# Altium PCB Oski_PCB.PcbDoc
Units mil, origin at the board's own origin, x right, y up, seen from the top; angles counter-clockwise.
Board outline 6000 x 4000 mil, 2 copper layers (Top Layer, Bottom Layer); 96 components, 138 nets, 653 pads, 0 vias.
Unrouted connection lines stored in the file: 361.
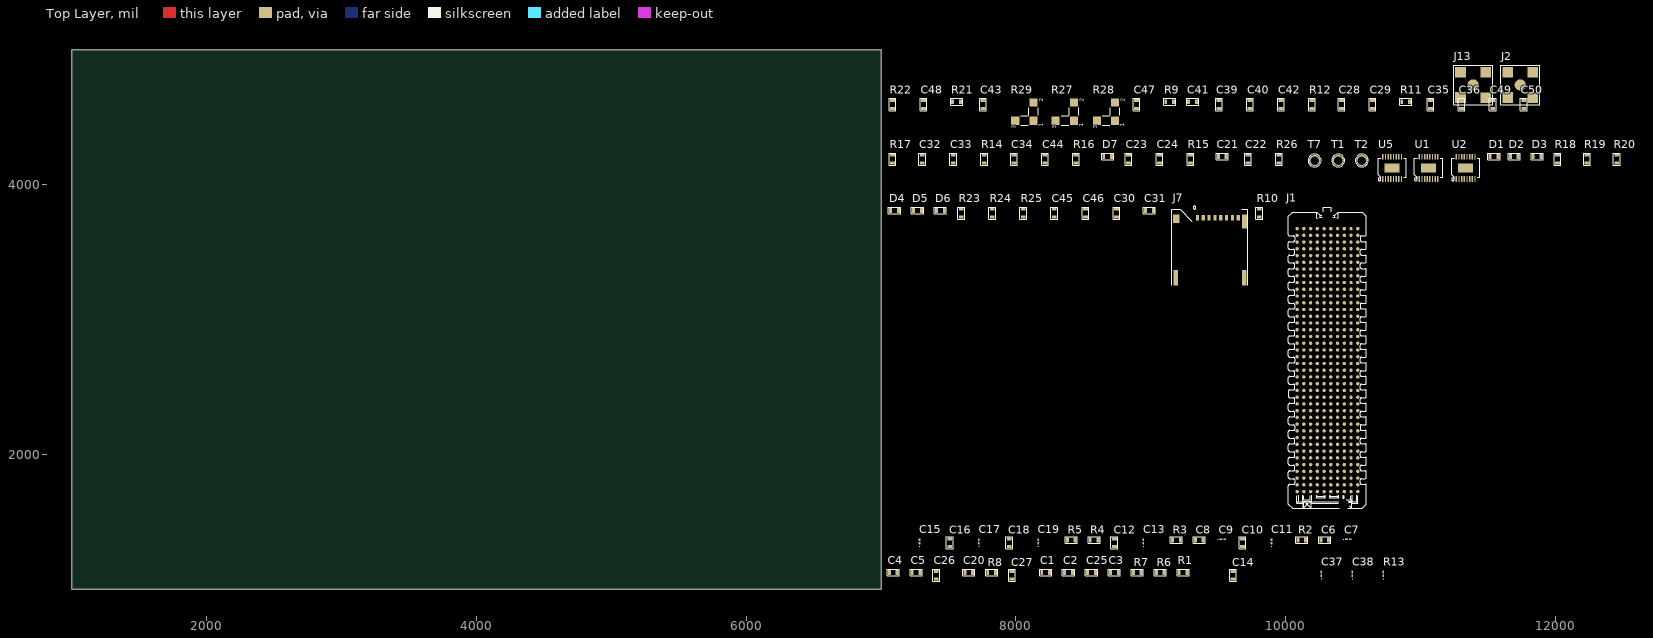
[diagram p0: Top Layer view]
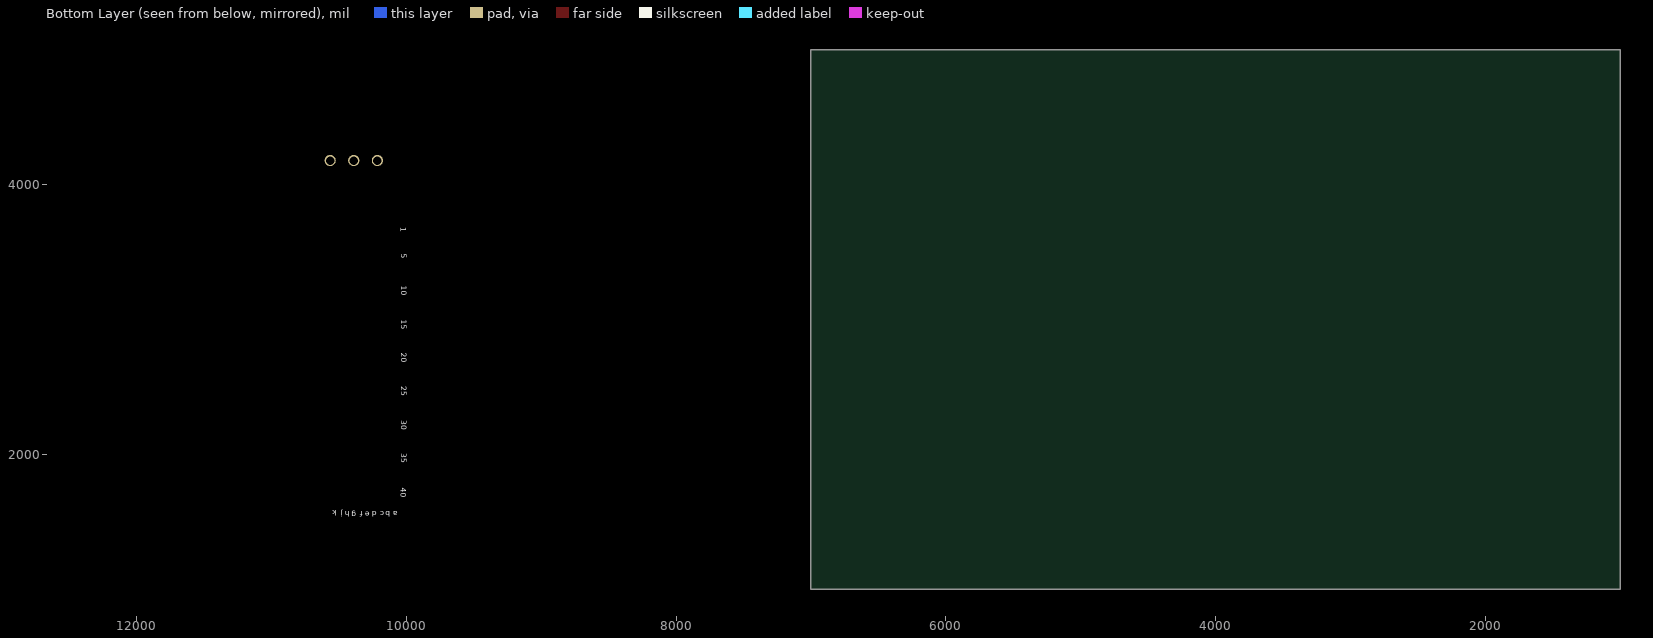
[diagram p1: Bottom Layer view, seen from below]

## Layer stack, top to bottom
Top Solder: solder mask 0.4, Solder Resist, Dk 3.5
Top Layer: signal copper 1.4
Dielectric 1: dielectric 12.6, FR-4, Dk 4.8
Bottom Layer: signal copper 1.4
Bottom Solder: solder mask 0.4, Solder Resist, Dk 3.5

## Board outline
1000,1000 7000,1000 7000,5000 1000,5000

## Design rules (kind name [scope] priority, off if disabled: settings)
Clearance [All] p1: gap=10 ignorepadtopadclearanceinfootprint=FALSE except(0: Arc-Hole Track-Hole SMDPad-Hole THPad-Hole Via-Hole Fill-Hole Poly-Hole Region-Hole Text-Hole)
PolygonConnect [All] p1: connectstyle=Relief reliefconductorwidth=10 reliefentries=4 polygonreliefangle="90 Angle" airgapwidth=10
RoomDefinition clocking [InComponentClass('clocking')] p1: confinementstyle=ConfineIn formatcopy=TRUE lockcomponents=FALSE outline 4185,3520 6185,3520 6185,4520 4185,4520
RoomDefinition RF_top [InComponentClass('RF_top')] p2: confinementstyle=ConfineIn formatcopy=TRUE lockcomponents=FALSE outline 1705,2090 3705,2090 3705,3090 1705,3090
RoomDefinition power [InComponentClass('power')] p3: confinementstyle=ConfineIn formatcopy=TRUE lockcomponents=FALSE outline 4200,2075 6200,2075 6200,3075 4200,3075
RoomDefinition Digital_top [InComponentClass('Digital_top')] p4: confinementstyle=ConfineIn formatcopy=TRUE lockcomponents=FALSE outline 1765,3510 3765,3510 3765,4510 1765,4510
RoutingVias [All] p1: holewidth=28 width=50 viastyle="Through Hole" minholewidth=28 minwidth=50 maxholewidth=28 maxwidth=50
SolderMaskExpansion [All] p1: expansion=4 istentingtop=FALSE
Width [All] p1: maxlimit=10 minlimit=10 preferedwidth=10
30 further rules are at their usual default settings.

## Classes and differential pairs
component class clocking: H7 J2 J6 J13 S1
component class RF_top: C28 C29 C35 C36 C39 C40 C41 C42 C43 C47 C48 C49 C50 R9 R11 R12 R21 R22 R27 R28 R29 RF_IO?
component class power: C1 C2 C3 C4 C5 C6 C8 C9 C10 C11 C12 C16 C19 C20 C21 C22 C23 C24 C25 C26 C32 C33 C34 C44 D1 D2 D3 D7 Power_IO R1 R2 R3 R4 R14 R15 R16 R17 R18 R19 R20 R26 R? T1 T2 T7 U1 U2 U5 U?
component class Digital_top: C1 C2 C3 C4 C20 C25 C26 C27 C30 C31 C37 C38 C45 C46 D4 D5 D6 Digital_IO J1 J7 R1 R6 R7 R8 R10 R13 R23 R24 R25 U?

## Components (designator, comment, footprint, x,y, rotation, side; value= is the part's Value field where it differs from the comment)
C1 "0.1uF" 0603#1 8220,1125 r0 top
C2 "0.1uF" 0603#1 8390,1125 r0 top
C3 "0.1uF" 0603#1 8730,1125 r0 top
C4 "0.1uF" 0603#1 7090,1125 r0 top
C5 "0.1uF" 0603#1 7260,1125 r0 top
C6 "0.1uF" 0603#1 10290,1365 r0 top
C7 "10uF" 0603#2 10465,1370 r0 top
C8 "0.1uF" 0603#1 9360,1365 r0 top
C9 "10uF" 0603#2 9535,1370 r0 top
C10 "0.1uF" 0603#1 9680,1345 r90 top
C11 "10uF" 0603#2 9895,1355 r90 top
C12 "0.1uF" 0603#1 8730,1345 r90 top
C13 "10uF" 0603#2 8945,1355 r90 top
C14 "0.1uF" 0603#1 9610,1105 r90 top
C15 "10uF" 0603#2 7285,1355 r90 top
C16 "0.1uF" 0603#1 7510,1345 r90 top
C17 "10uF" 0603#2 7725,1355 r90 top
C18 "0.1uF" 0603#1 7950,1345 r90 top
C19 "10uF" 0603#2 8165,1355 r90 top
C20 "0.1uF" 0603#1 7650,1125 r0 top
C21 "0.1uF" 0603#1 9530,4210 r0 top
C22 "10uF" 0603#1 9720,4190 r90 top
C23 "0.1uF" 0603#1 8835,4190 r90 top
C24 "10uF" 0603#1 9065,4190 r90 top
C25 "0.1uF" 0603#1 8560,1125 r0 top
C26 "0.1uF" 0603#1 7410,1105 r90 top
C27 "0.1uF" 0603#1 7970,1105 r90 top
C28 "10u" 0603#1 10415,4595 r90 top
C29 "0.1u" 0603#1 10645,4595 r90 top
C30 "0.1uF" 0603#1 8745,3790 r90 top
C31 "0.1uF" 0603#1 8990,3810 r0 top
C32 "0.1uF" 0603#1 7305,4190 r90 top
C33 "10uF" 0603#1 7535,4190 r90 top
C34 "0.1uF" 0603#1 7985,4190 r90 top
C35 "0.1u" 0603#1 11075,4595 r90 top
C36 "10u" 0603#1 11305,4595 r90 top
C37 "10uF" 0603#2 10265,1115 r90 top
C38 "10uF" 0603#2 10495,1115 r90 top
C39 "0.1u" 0603#1 9505,4595 r90 top
C40 "22p" 0603#1 9735,4595 r90 top
C41 "1n" 0603#1 9310,4615 r0 top
C42 "5.1p" 0603#1 9965,4595 r90 top
C43 "2.9p" 0603#1 7755,4595 r90 top
C44 "10uF" 0603#1 8215,4190 r90 top
C45 "0.1uF" 0603#1 8285,3790 r90 top
C46 "0.1uF" 0603#1 8515,3790 r90 top
C47 "5.1p" 0603#1 8895,4595 r90 top
C48 "2.9p" 0603#1 7315,4595 r90 top
C49 "0.1uF" 0603#1 11535,4595 r90 top
C50 "0.1uF" 0603#1 11765,4595 r90 top
D1 "DISCRETE_LED" 0603#1 11545,4210 r0 top
D2 "DISCRETE_LED" 0603#1 11695,4210 r0 top
D3 "DISCRETE_LED" 0603#1 11865,4210 r0 top
D4 "DISCRETE_LED" 0603#1 7100,3810 r0 top
D5 "DISCRETE_LED" 0603#1 7270,3810 r0 top
D6 "DISCRETE_LED" 0603#1 7440,3810 r0 top
D7 "DISCRETE_LED" 0603#1 8680,4210 r0 top
J1 "Con 400 pins in 10 parts: abcdefghjk VITA 57" CON-400-1.27-60.0X14.7/PLUG-SEARAY 10310,2700 r90 top
J2 "0732511352" CON-001-250X250/SMA-SMT 11740,4740 r0 top
J7 "uSD card conn 5033981892" CON-008-1.1-13.1X14.0/MICROSD_MOLEX 9440,3535 r0 top
J13 "0732511352" CON-001-250X250/SMA-SMT 11390,4740 r0 top
R1 "16k" 0603#1 9240,1125 r0 top
R2 "1300" 0603#1 10120,1365 r0 top
R3 "698" 0603#1 9190,1365 r0 top
R4 "200" 0603#1 8580,1365 r0 top
R5 "200" 0603#1 8410,1365 r0 top
R6 "16k" 0603#1 9070,1125 r0 top
R7 "16k" 0603#1 8900,1125 r0 top
R8 "16k" 0603#1 7820,1125 r0 top
R9 "33.2" 0603#1 9140,4615 r0 top
R10 "10k" 0603#1 9805,3790 r90 top
R11 "2.8k" 0603#1 10890,4615 r0 top
R12 "200" 0603#1 10195,4595 r90 top
R13 "0" 0603#2 10725,1115 r90 top
R14 "6.7k" 0603#1 7765,4190 r90 top
R15 "1500" 0603#1 9295,4190 r90 top
R16 "187" 0603#1 8445,4190 r90 top
R17 "10k" 0603#1 7085,4190 r90 top
R18 "470" 0603#1 12015,4190 r90 top
R19 "470" 0603#1 12235,4190 r90 top
R20 "470" 0603#1 12455,4190 r90 top
R21 "0" 0603#1 7560,4615 r0 top
R22 "0" 0603#1 7085,4595 r90 top
R23 "470" 0603#1 7595,3790 r90 top
R24 "470" 0603#1 7825,3790 r90 top
R25 "470" 0603#1 8055,3790 r90 top
R26 "470" 0603#1 9950,4190 r90 top
R27 "Resistors dual no stub" 1206-DUAL-NOSTUB 8430,4475 r0 top
R28 "Resistors dual no stub" 1206-DUAL-NOSTUB 8735,4475 r0 top
R29 "Resistors dual no stub" 1206-DUAL-NOSTUB 8130,4475 r0 top
T1 "575-4" TP-63/ROUND-THT 10390,4180 r0 top
T2 "575-4" TP-63/ROUND-THT 10565,4180 r0 top
T7 "575-4" TP-63/ROUND-THT 10215,4180 r0 top
U1 "LT3022" GW-16-.5-4.9X4.0/THM 11060,4125 r0 top
U2 "LT3022" GW-16-.5-4.9X4.0/THM 11335,4125 r0 top
U5 "LT3022" GW-16-.5-4.9X4.0/THM 10790,4125 r0 top

## Footprints (in the part's own frame and the unit in brackets; to place one, negate y for a bottom-side part, rotate by r counter-clockwise, add the part's x,y. Pads: shape width x height; smd on the part's side, far side on the other; paste and mask are expansions set on the pad)
0603#1 [mm]
  rect 0.55x0.9 smd mask+0: 1(-0.73,0) 2(0.73,0)
  silkscreen extent -1.14,-0.64 1.14,0.64, body extent -0.76,-0.38 0.76,0.38, height 0.89
0603#2 [mm] "Chip Inductor, Body 0.6x0.3mm, IPC High Density"
  rect 0.5x0.3 smd: 1(-0.35,0) 2(0.35,0)
  silkscreen extent -0.9,-0.05 -0.9,0.05, body extent -0.33,-0.18 0.33,0.18, height 0.55
1206-DUAL-NOSTUB [mil]
  rect 60x60 smd: 1(0,-0.02) 2(0,134.98) 3(-135,-0.02)
  silkscreen extent -95,-35 35,95
CON-001-250X250/SMA-SMT [mm]
  round 2.127 smd: 1(0,0)
  rect 2x2 smd: 2(-2.375,2.375) 3(2.375,2.375) 4(2.375,-2.375) 5(-2.375,-2.35)
  silkscreen extent -3.68,-3.68 3.68,3.68, body extent -3.17,-3.17 3.18,3.17, height 9.65
CON-008-1.1-13.1X14.0/MICROSD_MOLEX [mm]
  rect 0.6x1.05 smd: 1(-2.4,5.615) 2(-1.3,5.615) 3(-0.2,5.615) 4(0.9,5.615) 5(2,5.615) 6(3.1,5.615) 7(4.2,5.615) 8(5.3,5.615)
  rect 0.82x2.93 smd: 9(-6.46,-5.68) 10(6.42,-5.68)
  rect 1.16x1.63 smd: 11(-6.39,5.415)
  rect 0.98x2.6 smd: 12(6.48,4.915)
  silkscreen extent -7.24,-7.11 7.11,7.75, body extent -6.55,-7.03 6.55,7.02, height 0.83
CON-400-1.27-60.0X14.7/PLUG-SEARAY [mm] "Connector VITA 57, 400 Male contacts in 10 rows abcdefghij"
  round 0 hole 1.3 unplated: 1(-27.191,-3.048) 2(27.191,0)
  round 0.64 smd paste-0.32: a1(24.765,5.715) a2(23.495,5.715) a3(22.225,5.715) a4(20.955,5.715) a5(19.685,5.715) a6(18.415,5.715) a7(17.145,5.715) a8(15.875,5.715) a9(14.605,5.715) a10(13.335,5.715) a11(12.065,5.715) a12(10.795,5.715) a13(9.525,5.715) a14(8.255,5.715) a15(6.985,5.715) a16(5.715,5.715) a17(4.445,5.715) a18(3.175,5.715) a19(1.905,5.715) a20(0.635,5.715) a21(-0.635,5.715) a22(-1.905,5.715) a23(-3.175,5.715) a24(-4.445,5.715) a25(-5.715,5.715) a26(-6.985,5.715) a27(-8.255,5.715) a28(-9.525,5.715) a29(-10.795,5.715) a30(-12.065,5.715) a31(-13.335,5.715) a32(-14.605,5.715) a33(-15.875,5.715) a34(-17.145,5.715) a35(-18.415,5.715) a36(-19.685,5.715) a37(-20.955,5.715) a38(-22.225,5.715) a39(-23.495,5.715) a40(-24.765,5.715) b1(24.765,4.445) b2(23.495,4.445) b3(22.225,4.445) b4(20.955,4.445) b5(19.685,4.445) b6(18.415,4.445) b7(17.145,4.445) b8(15.875,4.445) b9(14.605,4.445) b10(13.335,4.445) b11(12.065,4.445) b12(10.795,4.445) b13(9.525,4.445) b14(8.255,4.445) b15(6.985,4.445) b16(5.715,4.445) b17(4.445,4.445) b18(3.175,4.445) b19(1.905,4.445) b20(0.635,4.445) b21(-0.635,4.445) b22(-1.905,4.445) b23(-3.175,4.445) b24(-4.445,4.445) b25(-5.715,4.445) b26(-6.985,4.445) b27(-8.255,4.445) b28(-9.525,4.445) b29(-10.795,4.445) b30(-12.065,4.445) b31(-13.335,4.445) b32(-14.605,4.445) b33(-15.875,4.445) b34(-17.145,4.445) b35(-18.415,4.445) b36(-19.685,4.445) b37(-20.955,4.445) b38(-22.225,4.445) b39(-23.495,4.445) b40(-24.765,4.445) c1(24.765,3.175) c2(23.495,3.175) c3(22.225,3.175) c4(20.955,3.175) c5(19.685,3.175) c6(18.415,3.175) c7(17.145,3.175) c8(15.875,3.175) c9(14.605,3.175) c10(13.335,3.175) c11(12.065,3.175) c12(10.795,3.175) c13(9.525,3.175) c14(8.255,3.175) c15(6.985,3.175) c16(5.715,3.175) c17(4.445,3.175) c18(3.175,3.175) c19(1.905,3.175) c20(0.635,3.175) c21(-0.635,3.175) c22(-1.905,3.175) c23(-3.175,3.175) c24(-4.445,3.175) c25(-5.715,3.175) c26(-6.985,3.175) c27(-8.255,3.175) c28(-9.525,3.175) c29(-10.795,3.175) c30(-12.065,3.175) c31(-13.335,3.175) c32(-14.605,3.175) c33(-15.875,3.175) c34(-17.145,3.175) c35(-18.415,3.175) c36(-19.685,3.175) c37(-20.955,3.175) c38(-22.225,3.175) c39(-23.495,3.175) c40(-24.765,3.175) d1(24.765,1.905) d2(23.495,1.905) d3(22.225,1.905) d4(20.955,1.905) d5(19.685,1.905) d6(18.415,1.905) d7(17.145,1.905) d8(15.875,1.905) d9(14.605,1.905) d10(13.335,1.905) d11(12.065,1.905) d12(10.795,1.905) d13(9.525,1.905) d14(8.255,1.905) d15(6.985,1.905) d16(5.715,1.905) d17(4.445,1.905) d18(3.175,1.905) d19(1.905,1.905) d20(0.635,1.905) d21(-0.635,1.905) d22(-1.905,1.905) d23(-3.175,1.905) d24(-4.445,1.905) d25(-5.715,1.905) d26(-6.985,1.905) d27(-8.255,1.905) d28(-9.525,1.905) d29(-10.795,1.905) d30(-12.065,1.905) d31(-13.335,1.905) d32(-14.605,1.905) d33(-15.875,1.905) d34(-17.145,1.905) d35(-18.415,1.905) d36(-19.685,1.905) d37(-20.955,1.905) d38(-22.225,1.905) d39(-23.495,1.905) d40(-24.765,1.905) e1(24.765,0.635) e2(23.495,0.635) e3(22.225,0.635) e4(20.955,0.635) e5(19.685,0.635) e6(18.415,0.635) e7(17.145,0.635) e8(15.875,0.635) e9(14.605,0.635) e10(13.335,0.635) e11(12.065,0.635) e12(10.795,0.635) e13(9.525,0.635) e14(8.255,0.635) e15(6.985,0.635) e16(5.715,0.635) e17(4.445,0.635) e18(3.175,0.635) e19(1.905,0.635) e20(0.635,0.635) e21(-0.635,0.635) e22(-1.905,0.635) e23(-3.175,0.635) e24(-4.445,0.635) e25(-5.715,0.635) e26(-6.985,0.635) e27(-8.255,0.635) e28(-9.525,0.635) e29(-10.795,0.635) e30(-12.065,0.635) e31(-13.335,0.635) e32(-14.605,0.635) e33(-15.875,0.635) e34(-17.145,0.635) e35(-18.415,0.635) e36(-19.685,0.635) e37(-20.955,0.635) e38(-22.225,0.635) e39(-23.495,0.635) e40(-24.765,0.635) f1(24.765,-0.635) f2(23.495,-0.635) f3(22.225,-0.635) f4(20.955,-0.635) f5(19.685,-0.635) f6(18.415,-0.635) f7(17.145,-0.635) f8(15.875,-0.635) f9(14.605,-0.635) f10(13.335,-0.635) f11(12.065,-0.635) f12(10.795,-0.635) f13(9.525,-0.635) f14(8.255,-0.635) f15(6.985,-0.635) f16(5.715,-0.635) f17(4.445,-0.635) f18(3.175,-0.635) f19(1.905,-0.635) f20(0.635,-0.635) f21(-0.635,-0.635) f22(-1.905,-0.635) f23(-3.175,-0.635) f24(-4.445,-0.635) f25(-5.715,-0.635) f26(-6.985,-0.635) f27(-8.255,-0.635) f28(-9.525,-0.635) f29(-10.795,-0.635) f30(-12.065,-0.635) f31(-13.335,-0.635) f32(-14.605,-0.635) f33(-15.875,-0.635) f34(-17.145,-0.635) f35(-18.415,-0.635) f36(-19.685,-0.635) f37(-20.955,-0.635) f38(-22.225,-0.635) f39(-23.495,-0.635) f40(-24.765,-0.635) g1(24.765,-1.905) g2(23.495,-1.905) g3(22.225,-1.905) g4(20.955,-1.905) g5(19.685,-1.905) g6(18.415,-1.905) g7(17.145,-1.905) g8(15.875,-1.905) g9(14.605,-1.905) g10(13.335,-1.905) g11(12.065,-1.905) g12(10.795,-1.905) g13(9.525,-1.905) g14(8.255,-1.905) g15(6.985,-1.905) g16(5.715,-1.905) g17(4.445,-1.905) g18(3.175,-1.905) g19(1.905,-1.905) g20(0.635,-1.905) g21(-0.635,-1.905) g22(-1.905,-1.905) g23(-3.175,-1.905) g24(-4.445,-1.905) g25(-5.715,-1.905) g26(-6.985,-1.905) g27(-8.255,-1.905) g28(-9.525,-1.905) g29(-10.795,-1.905) g30(-12.065,-1.905) g31(-13.335,-1.905) g32(-14.605,-1.905) g33(-15.875,-1.905) g34(-17.145,-1.905) g35(-18.415,-1.905) g36(-19.685,-1.905) g37(-20.955,-1.905) g38(-22.225,-1.905) g39(-23.495,-1.905) g40(-24.765,-1.905) h1(24.765,-3.175) h2(23.495,-3.175) h3(22.225,-3.175) h4(20.955,-3.175) h5(19.685,-3.175) h6(18.415,-3.175) h7(17.145,-3.175) h8(15.875,-3.175) h9(14.605,-3.175) h10(13.335,-3.175) h11(12.065,-3.175) h12(10.795,-3.175) h13(9.525,-3.175) h14(8.255,-3.175) h15(6.985,-3.175) h16(5.715,-3.175) h17(4.445,-3.175) h18(3.175,-3.175) h19(1.905,-3.175) h20(0.635,-3.175) h21(-0.635,-3.175) h22(-1.905,-3.175) h23(-3.175,-3.175) h24(-4.445,-3.175) h25(-5.715,-3.175) h26(-6.985,-3.175) h27(-8.255,-3.175) h28(-9.525,-3.175) h29(-10.795,-3.175) h30(-12.065,-3.175) h31(-13.335,-3.175) h32(-14.605,-3.175) h33(-15.875,-3.175) h34(-17.145,-3.175) h35(-18.415,-3.175) h36(-19.685,-3.175) h37(-20.955,-3.175) h38(-22.225,-3.175) h39(-23.495,-3.175) h40(-24.765,-3.175) j1(24.765,-4.445) j2(23.495,-4.445) j3(22.225,-4.445) j4(20.955,-4.445) j5(19.685,-4.445) j6(18.415,-4.445) j7(17.145,-4.445) j8(15.875,-4.445) j9(14.605,-4.445) j10(13.335,-4.445) j11(12.065,-4.445) j12(10.795,-4.445) j13(9.525,-4.445) j14(8.255,-4.445) j15(6.985,-4.445) j16(5.715,-4.445) j17(4.445,-4.445) j18(3.175,-4.445) j19(1.905,-4.445) j20(0.635,-4.445) j21(-0.635,-4.445) j22(-1.905,-4.445) j23(-3.175,-4.445) j24(-4.445,-4.445) j25(-5.715,-4.445) j26(-6.985,-4.445) j27(-8.255,-4.445) j28(-9.525,-4.445) j29(-10.795,-4.445) j30(-12.065,-4.445) j31(-13.335,-4.445) j32(-14.605,-4.445) j33(-15.875,-4.445) j34(-17.145,-4.445) j35(-18.415,-4.445) j36(-19.685,-4.445) j37(-20.955,-4.445) j38(-22.225,-4.445) j39(-23.495,-4.445) j40(-24.765,-4.445) k1(24.765,-5.715) k2(23.495,-5.715) k3(22.225,-5.715) k4(20.955,-5.715) k5(19.685,-5.715) k6(18.415,-5.715) k7(17.145,-5.715) k8(15.875,-5.715) k9(14.605,-5.715) k10(13.335,-5.715) k11(12.065,-5.715) k12(10.795,-5.715) k13(9.525,-5.715) k14(8.255,-5.715) k15(6.985,-5.715) k16(5.715,-5.715) k17(4.445,-5.715) k18(3.175,-5.715) k19(1.905,-5.715) k20(0.635,-5.715) k21(-0.635,-5.715) k22(-1.905,-5.715) k23(-3.175,-5.715) k24(-4.445,-5.715) k25(-5.715,-5.715) k26(-6.985,-5.715) k27(-8.255,-5.715) k28(-9.525,-5.715) k29(-10.795,-5.715) k30(-12.065,-5.715) k31(-13.335,-5.715) k32(-14.605,-5.715) k33(-15.875,-5.715) k34(-17.145,-5.715) k35(-18.415,-5.715) k36(-19.685,-5.715) k37(-20.955,-5.715) k38(-22.225,-5.715) k39(-23.495,-5.715) k40(-24.765,-5.715)
  silkscreen extent -27.89,-7.34 28.78,7.34, body extent -27.89,-7.34 28.78,7.34, height 5.61
GW-16-.5-4.9X4.0/THM [mm]
  rect 0.25x1.1 smd: 1(-1.75,-2.1) 2(-1.25,-2.1) 3(-0.75,-2.1) 4(-0.25,-2.1) 5(0.25,-2.1) 6(0.75,-2.1) 7(1.25,-2.1) 8(1.75,-2.1) 9(1.75,2.1) 10(1.25,2.1) 11(0.75,2.1) 12(0.25,2.1) 13(-0.25,2.1) 14(-0.75,2.1) 15(-1.25,2.1) 16(-1.75,2.1)
  rect 2.85x1.65 smd: 17(0,0)
  silkscreen extent -2.67,-2.41 2.67,1.78, body extent -2.5,-1.5 2.5,1.5, height 0.5
TP-63/ROUND-THT [mil]
  round 83 hole 63 mask+0: 1(0,0)
  silkscreen extent -48,-48 48,48, body extent -62,-62 62,63, height 220

## Part data
C1 C2 C3 C4 C5 C6 C8 C10 C12 C14 C16 C18 C20 C21 C23 C25 C26 C27 C30 C31 C32 C34 C45 C46 C49 C50: library part DISCRETE_C, "0.1uF 0402"
C7 C9 C11 C13 C15 C17 C19 C22 C24 C33 C37 C38 C44: library part DISCRETE_C, "10uF 0603"
C28 C29 C35 C36 C39 C40 C41 C42 C43 C47 C48: library part DISCRETE_C, "Capacitor generic"
D1 D2 D3 D4 D5 D6 D7: "LED generic"
J1: library part CON_400pin_10x40_VITA57_PLUG, "Con VITA 57, 400 male contacts in 10 parts abcdefghjk", Author="CERN DEM JLC"
J2 J13: library part CON_RF_SMA, "Con RF SMA"
J7: library part CON_010pin_uSD_CARD_RECP, "Con 8 pins secure digital card slot (micro)"
R1 R6 R7 R8: library part DISCRETE_R
R2 R3 R4 R5 R15 R16 R18 R19 R20 R23 R24 R25 R26: library part DISCRETE_R, "200 0402"
R9 R11 R12 R14 R17 R21 R22: library part DISCRETE_R, "Resistor generic"
R10: library part DISCRETE_R, "16k"
R13: library part DISCRETE_R, "0 0603"
R27 R28 R29: library part DISCRETE_R_DUAL
T1 T2 T7: library part TEST_PT, "Test point"
U1 U2 U5: library part IC_LT3022, "LT3022 regulator LDO adjustable 1A"

## Nets (pads, with @x,y where several pads share a name; then routed paths per layer and width w, separated by ;. In a path a pad name is that pad's centre, name@x,y a point inside that pad or via, vN(x,y) a via of type N, cw(c..) or ccw(c..) an arc to the next point about the centre after c; other vN are vias at no path point)
20MHz_1V8: 
ADJ_0V9: R3.2 R5.1 U2.5
ADJ_1V5: R2.2 R4.1 U1.5
ADJ_1V8: R15.2 R16.1 U5.5
CS_TOGGLE: 
DBB_RX_1V8: 
DBB_RX_3V0: 
DBB_RX_3V0_RF: 
DBB_TX_1V8: 
DBB_TX_3V0: 
DBB_TX_3V0_RF: 
EXT_3V3: 
FMC_1V8: C37.1 J1.e39 J1.f1 J1.f40 J1.g39 J1.h40
FMC_3V3: C38.1 J1.c39 J1.d32 J1.d36 J1.d38 J1.d40
FMC_ADC_CLK_TOP: J1.e3
FMC_CLK_TOP: J1.h7
FMC_GA1: J1.d35
FMC_JTAG_TDI_3V3: J1.d30 R13.2
FMC_JTAG_TDO_3V3: J1.d31 R13.1
GND: C1.2 C2.1 C2.2 C3.2 C4.2 C5.1 C5.2 C6.2 C7.2 C8.2 C9.2 C10.2 C11.2 C12.2 C13.2 C14.2 C15.2 C16.2 C17.2 C18.2 C19.2 C20.2 C21.2 C22.2 C23.2 C24.2 C25.1 C25.2 C26.1 C26.2 C27.2 C28.2 C29.2 C30.1 C30.2 C31.2 C32.2 C33.2 C34.2 C35.2 C36.2 C37.2 C38.2 C39.2 C40.2 C41.2 C44.2 C45.1 C45.2 C46.2 C49.1 C49.2 C50.2 D1.1 D2.1 D3.1 D4.1 D5.1 D6.1 D7.1 J1.a1 J1.a4 J1.a5 J1.a8 J1.a9 J1.a12 J1.a13 J1.a16 J1.a17 J1.a20 J1.a21 J1.a24 J1.a25 J1.a28 J1.a29 J1.a32 J1.a33 J1.a36 J1.a37 J1.a40 J1.b2 J1.b3 J1.b6 J1.b7 J1.b10 J1.b11 J1.b14 J1.b15 J1.b18 J1.b19 J1.b22 J1.b23 J1.b26 J1.b27 J1.b30 J1.b31 J1.b34 J1.b35 J1.b38 J1.b39 J1.c1 J1.c4 J1.c5 J1.c8 J1.c9 J1.c12 J1.c13 J1.c16 J1.c17 J1.c20 J1.c21 J1.c24 J1.c25 J1.c28 J1.c29 J1.c32 J1.c33 J1.c36 J1.c38 J1.c40 J1.d2 J1.d3 J1.d6 J1.d7 J1.d10 J1.d13 J1.d16 J1.d19 J1.d22 J1.d25 J1.d28 J1.d37 J1.d39 J1.e1 J1.e4 J1.e5 J1.e8 J1.e11 J1.e14 J1.e17 J1.e20 J1.e23 J1.e26 J1.e29 J1.e32 J1.e35 J1.e38 J1.e40 J1.f2 J1.f3 J1.f6 J1.f9 J1.f12 J1.f15 J1.f18 J1.f21 J1.f24 J1.f27 J1.f30 J1.f33 J1.f36 J1.f39 J1.g1 J1.g4 J1.g5 J1.g8 J1.g11 J1.g14 J1.g17 J1.g20 J1.g23 J1.g26 J1.g29 J1.g32 J1.g35 J1.g38 J1.g40 J1.h2 J1.h3 J1.h6 J1.h9 J1.h12 J1.h15 J1.h18 J1.h21 J1.h24 J1.h27 J1.h30 J1.h33 J1.h36 J1.h39 J1.j1 J1.j4 J1.j5 J1.j8 J1.j11 J1.j14 J1.j17 J1.j20 J1.j23 J1.j26 J1.j29 J1.j32 J1.j35 J1.j38 J1.j40 J1.k2 J1.k3 J1.k6 J1.k9 J1.k12 J1.k15 J1.k18 J1.k21 J1.k24 J1.k27 J1.k30 J1.k33 J1.k36 J1.k39 J2.2 J2.3 J2.4 J2.5 J7.6 J7.11 J7.12 J13.2 J13.3 J13.4 J13.5 R4.2 R5.2 R10.1 R12.2 R16.2 R17.2 R18.1 U1.1 U1.2 U1.6 U1.7 U1.8 U1.10 U1.11 U1.15 U1.16 U1.17 U2.1 U2.2 U2.6 U2.7 U2.8 U2.10 U2.11 U2.15 U2.16 U2.17 U5.1 U5.2 U5.6 U5.7 U5.8 U5.10 U5.11 U5.15 U5.16 U5.17
GPIO_0_1V8: J1.g34
GPIO_0_3V3: 
GPIO_1_1V8: J1.g36
GPIO_2_1V8: J1.g37
I_REF: 
JTAG_TCK_1V8: J1.g13
JTAG_TCK_3V3: 
JTAG_TDI_1V8: J1.g10
JTAG_TDI_3V3: 
JTAG_TDO_1V8: J1.g12
JTAG_TDO_3V3: 
JTAG_TMS_1V8: J1.g9
JTAG_TMS_3V3: 
LED0: R23.1
LED1: R24.1
LED2: R25.1
MSEL_1V8: J1.g7
NetC14_1: C14.1 C15.1
NetC16_1: C16.1 C17.1
NetC18_1: C18.1 C19.1
NetC21_1: C21.1 C22.1 R15.1 T7.1 U5.3 U5.4
NetC32_1: C32.1 C33.1
NetC34_1: C34.1 C44.1
NetC42_2: C42.2
NetC43_2: C43.2 R21.1
NetC47_1: C47.1
NetC47_2: C47.2
NetC48_1: C48.1
NetC48_2: C48.2 R22.1
NetD1_2: D1.2 R18.2
NetD2_2: D2.2 R19.2
NetD3_2: D3.2 R20.2
NetD4_2: D4.2 R23.2
NetD5_2: D5.2 R24.2
NetD6_2: D6.2 R25.2
NetD7_2: D7.2 R26.2
NetH2_2: R14.2
NetH3_1: J13.1
NetH3_2: 
NetH6_2: R17.1
NetH7_1: J2.1
NetH7_2: 
NetJ3_1: 
NetJ5_1: 
NetJ11_1: R27.3
NetJ12_1: R28.2
NetJ14_2: 
NetJ15_2: 
NetJ16_4: 
NetJ19_1: 
NetJ21_1: R22.2
NetJ27_2: 
NetJ28_1: 
NetJ28_2: 
NetJ31_1: 
NetJ31_2: 
NetJ32_1: 
NetJ32_2: 
NetJ33_1: 
NetJ33_2: 
NetJ36_2: 
NetJ38_1: R29.3
NetR9_2: R9.2
NetR11_2: R11.2 R12.1
NetR14_1: R14.1
NetR27_2: R27.2
NetR28_3: R28.3
NetR29_2: R29.2
RESET_1V8: J1.h34 R10.2
RESET_3V3: 
RF_3V0: C31.1 C35.1 C36.1 C39.1 C40.1 C41.1 R9.1 R11.1
RF_3V3: C28.1 C29.1
RF_REF_CLK_0V9: 
RF_REF_CLK_1V8: 
RF_RX: C43.1
RF_RX_M: R21.2 R28.1
RF_TX: C42.1
RF_TX_AMP: R27.1
RF_TX_M: R29.1
SPI_CS_1V8: J1.g16 J1.g18
SPI_CS_3V3: 
SPI_CS_FLASH: 
SPI_CS_SD: J7.2 R1.2
SPI_DQ_0_1V8: J1.g27
SPI_DQ_0_3V3: 
SPI_DQ_1\_1V8: 
SPI_DQ_1_1V8: J1.g28
SPI_DQ_1_3V3: 
SPI_DQ_2_1V8: J1.g30
SPI_DQ_2_3V3: 
SPI_DQ_3_1V8: J1.g31
SPI_DQ_3_3V3: 
SPI_MISO_3V3: J7.7 R8.2
SPI_MOSI_3V3: J7.3 R6.2
SPI_SCK_1V8: J1.g15 J1.g19
SPI_SCK_3V3: J7.5 R7.2
SS2: 
SS3: 
TEST_1_RF: 
TEST_2_RF: 
TEST_3_RF: 
TEST_4_RF: 
TL_CLK_1V8: J1.h26
TL_IN_DAT_1V8: J1.h17
TL_IN_RDY_1V8: J1.h22
TL_IN_VAL_1V8: J1.h19
TL_OUT_DAT_1V8: J1.h23
TL_OUT_RDY_1V8: J1.h16
TL_OUT_VAL_1V8: J1.h25
UART_RX_1V8: J1.h37
UART_RX_3V3: 
UART_TX_1V8: J1.h38
UART_TX_3V3: 
VDD_0V9: C8.1 C9.1 C50.1 R3.1 R20.1 T2.1 U2.3 U2.4
VDD_1V5: C6.1 C7.1 R2.1 R19.1 T1.1 U1.3 U1.4
VDD_3V3: C1.1 C3.1 C4.1 C10.1 C11.1 C12.1 C13.1 C20.1 C23.1 C24.1 C27.1 C46.1 J7.4 R1.1 R6.1 R7.1 R8.1 R26.1 U1.9 U1.12 U1.13 U1.14 U2.9 U2.12 U2.13 U2.14 U5.9 U5.12 U5.13 U5.14
VDD_A: 
VDD_D: 
pads on no net: J1.1 J1.2 J1.a2 J1.a3 J1.a6 J1.a7 J1.a10 J1.a11 J1.a14 J1.a15 J1.a18 J1.a19 J1.a22 J1.a23 J1.a26 J1.a27 J1.a30 J1.a31 J1.a34 J1.a35 J1.a38 J1.a39 J1.b1 J1.b4 J1.b5 J1.b8 J1.b9 J1.b12 J1.b13 J1.b16 J1.b17 J1.b20 J1.b21 J1.b24 J1.b25 J1.b28 J1.b29 J1.b32 J1.b33 J1.b36 J1.b37 J1.b40 J1.c2 J1.c3 J1.c6 J1.c7 J1.c10 J1.c11 J1.c14 J1.c15 J1.c18 J1.c19 J1.c22 J1.c23 J1.c26 J1.c27 J1.c30 J1.c31 J1.c34 J1.c35 J1.c37 J1.d1 J1.d4 J1.d5 J1.d8 J1.d9 J1.d11 J1.d12 J1.d14 J1.d15 J1.d17 J1.d18 J1.d20 J1.d21 J1.d23 J1.d24 J1.d26 J1.d27 J1.d29 J1.d33 J1.d34 J1.e2 J1.e6 J1.e7 J1.e9 J1.e10 J1.e12 J1.e13 J1.e15 J1.e16 J1.e18 J1.e19 J1.e21 J1.e22 J1.e24 J1.e25 J1.e27 J1.e28 J1.e30 J1.e31 J1.e33 J1.e34 J1.e36 J1.e37 J1.f4 J1.f5 J1.f7 J1.f8 J1.f10 J1.f11 J1.f13 J1.f14 J1.f16 J1.f17 J1.f19 J1.f20 J1.f22 J1.f23 J1.f25 J1.f26 J1.f28 J1.f29 J1.f31 J1.f32 J1.f34 J1.f35 J1.f37 J1.f38 J1.g2 J1.g3 J1.g6 J1.g21 J1.g22 J1.g24 J1.g25 J1.g33 J1.h1 J1.h4 J1.h5 J1.h8 J1.h10 J1.h11 J1.h13 J1.h14 J1.h20 J1.h28 J1.h29 J1.h31 J1.h32 J1.h35 J1.j2 J1.j3 J1.j6 J1.j7 J1.j9 J1.j10 J1.j12 J1.j13 J1.j15 J1.j16 J1.j18 J1.j19 J1.j21 J1.j22 J1.j24 J1.j25 J1.j27 J1.j28 J1.j30 J1.j31 J1.j33 J1.j34 J1.j36 J1.j37 J1.j39 J1.k1 J1.k4 J1.k5 J1.k7 J1.k8 J1.k10 J1.k11 J1.k13 J1.k14 J1.k16 J1.k17 J1.k19 J1.k20 J1.k22 J1.k23 J1.k25 J1.k26 J1.k28 J1.k29 J1.k31 J1.k32 J1.k34 J1.k35 J1.k37 J1.k38 J1.k40 J7.1 J7.8 J7.9 J7.10

## Text inside footprints (layer, text, board x,y; h text height)
J1: Bottom Overlay "35" at 10038.94,2010.63 h40 r90; Bottom Overlay "30" at 10038.94,2254.92 h40 r90; Bottom Overlay "25" at 10038.94,2505.91 h40 r90; Bottom Overlay "20" at 10038.94,2753.54 h40 r90; Bottom Overlay "15" at 10038.94,2997.83 h40 r90; Bottom Overlay "10" at 10038.94,3252.17 h40 r90; Bottom Overlay "5" at 10038.94,3488 h40 r90; Bottom Overlay "j" at 10470,1580 h39.37 r180; Bottom Overlay "g" at 10370,1570 h39.37 r180; Bottom Overlay "a" at 10065,1580 h39.37 r180; Bottom Overlay "d" at 10220,1580 h39.37 r180; Bottom Overlay "k" at 10515,1585 h39.37 r180; Bottom Overlay "h" at 10420,1580 h39.37 r180; Bottom Overlay "f" at 10325,1580 h39.37 r180; Bottom Overlay "e" at 10270,1575 h39.37 r180; Bottom Overlay "c" at 10165,1580 h39.37 r180; Bottom Overlay "b" at 10120,1580 h39.37 r180; Bottom Overlay "40" at 10040,1755 h40 r90; Bottom Overlay "1" at 10040,3685 h40 r90; Top Assembly "1" at 10602.82,3654.33 h39.37
R27: Top Overlay "2" at 8502,4617 h30 r90; Top Overlay "3" at 8298,4415 h30 r90; Top Overlay "1" at 8500,4431 h30 r90
R28: Top Overlay "2" at 8807,4617 h30 r90; Top Overlay "3" at 8603,4415 h30 r90; Top Overlay "1" at 8805,4431 h30 r90
R29: Top Overlay "2" at 8202,4617 h30 r90; Top Overlay "3" at 7998,4415 h30 r90; Top Overlay "1" at 8200,4431 h30 r90